# Altium PCB Pic_Board.PCBDOC
Units mm, origin at the board's own origin, x right, y up, seen from the top; angles counter-clockwise.
Board outline 100 x 100 mm, 2 copper layers (TopLayer, BottomLayer); 37 components, 78 nets, 219 pads, 13 vias.
Unrouted connection lines stored in the file: 1.
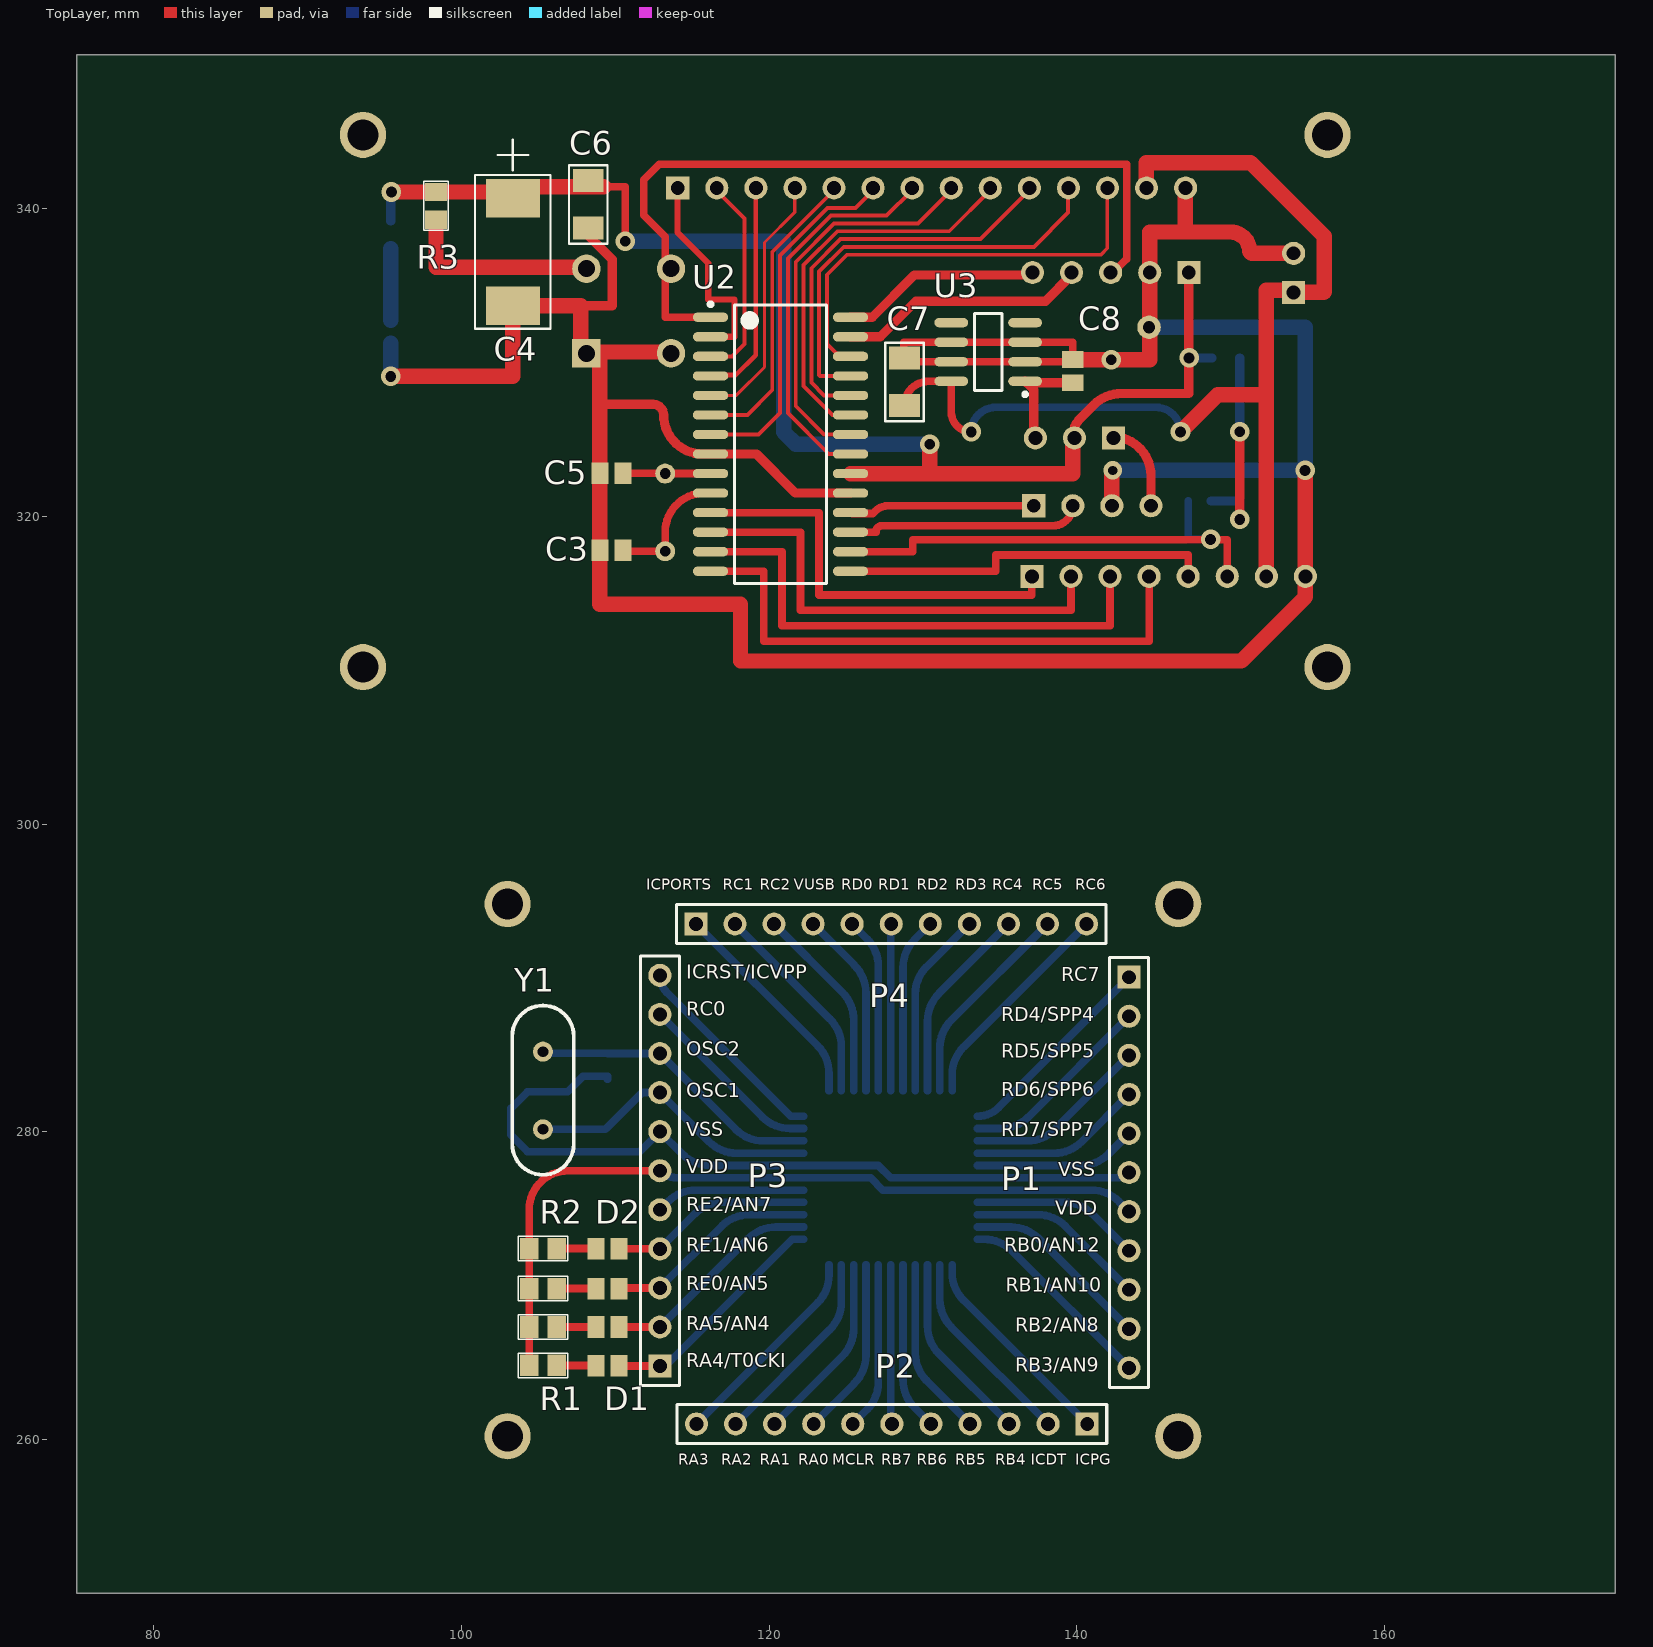
[diagram p0: TopLayer view]
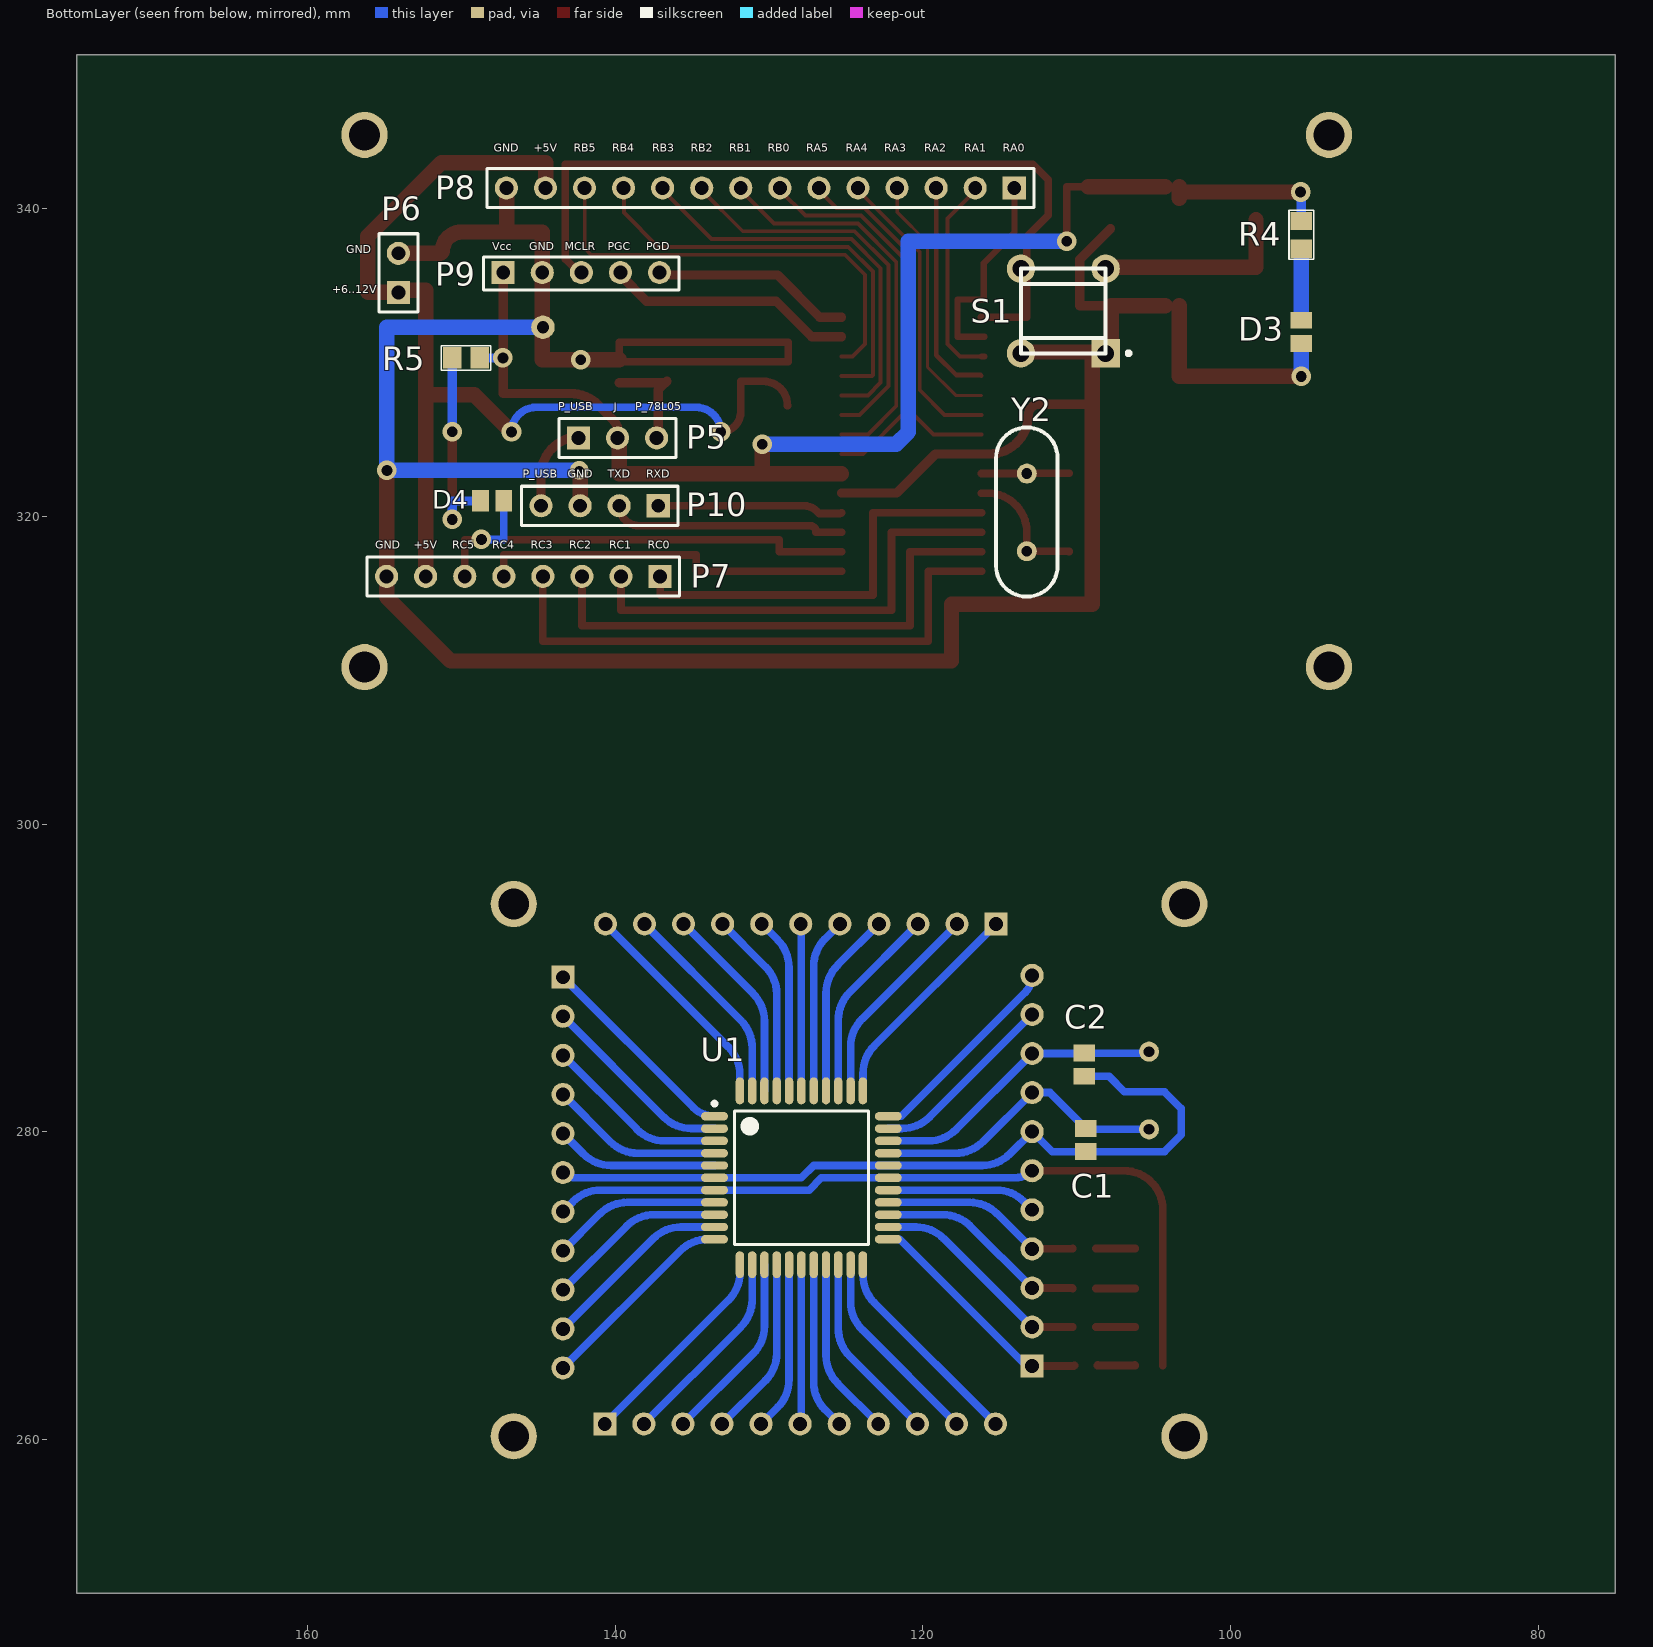
[diagram p1: BottomLayer view, seen from below]

## Layer stack, top to bottom
TopLayer: signal copper 0.0356
Dielectric1: core 0.32, FR-4, Dk 4.8
BottomLayer: signal copper 0.0356

## Board outline
175,350 175,250 75,250 75,350

## Design rules (kind name [scope] priority, off if disabled: settings)
Clearance [All] p1: gap=0.15 ignorepadtopadclearanceinfootprint=FALSE except(0: Arc-Hole Track-Hole SMDPad-Hole THPad-Hole Via-Hole Fill-Hole Poly-Hole Region-Hole Text-Hole)
FabricationTestPointUsage TestPointUsage [All] p1: valid=0 allowmultiple=FALSE
FabricationTestpoint Testpoint [All] p1: side=3 testpointundercomponent=TRUE minsize=1.016 maxsize=2.54 preferedsize=1.524 minholesize=0.508 maxholesize=1.016 preferedholesize=0.813 testpointgrid=0.025 allowsidetop=TRUE allowsidebottom=TRUE usegrid=TRUE gridtolerance=0
PasteMaskExpansion PasteMaskExpansion_1 [InComponent('P1')] p1: expansion=-3.81
PasteMaskExpansion [All] p2: expansion=0
PlaneClearance [All] p1: clearance=0.254
PolygonConnect [All] p1: connectstyle=Relief reliefconductorwidth=0.254 reliefentries=4 polygonreliefangle="90 Angle" airgapwidth=0.254
RoutingVias [All] p1: holewidth=0.711 width=1.27 viastyle="Through Hole" minholewidth=0.711 minwidth=1.27 maxholewidth=0.711 maxwidth=1.27
SilkToSolderMaskClearance SilkscreenOverComponentPads [IsPad] p1: minsilkscreentomaskgap=0.254 clearancetoexposedcopper=TRUE
SolderMaskExpansion [All] p1: expansion=0.051
Width Width_CLK [All] p1: maxlimit=1 minlimit=0.1 preferedwidth=0.15
Width Width_gnd [InNet('GND')] p2: maxlimit=1 minlimit=0.1 preferedwidth=0.254 minimp=50.000000 maximp=50.000000 favimp=50.000000
25 further rules are at their usual default settings.

## Components (designator, comment, footprint, x,y, rotation, side; value= is the part's Value field where it differs from the comment)
1 "Diod" C0805 109.5,267.3 r0 top
2 "Diod" C0805 109.5,269.8 r0 top
3 "0" 6-0805_N 105.3,267.3 r0 top value=510
4 "0" 6-0805_N 105.3,269.8 r0 top value=510
C1 "Cap_20pF" C0805 109.4,279.45 r270 bottom value=20pF
C2 "Cap_20pF" C0805 109.5,284.35 r270 bottom value=20pF
C3 "Cap_20pF" C0805 109.75,317.8 r180 top value=20pF
C4 "Cap_10uF" 2917(TAJ-D) 103.345,340.687 r90 top value=10uF
C5 "Cap_20pF" C0805 109.75,322.8 r180 top value=20pF
C6 "Cap_1uF" 1206 108.245,340.287 r90 top value=1uF
C7 "Cap_0.33uF" 1206 128.8,328.75 r90 top value=0.33uF
C8 "Cap_0.1uF" C0805 139.745,329.437 r90 top value=0.1uF
D1 "Diod" C0805 109.5,264.775 r0 top
D2 "Diod" C0805 109.5,272.4 r0 top
D3 "Diod" C0805 95.4,332 r270 bottom
D4 "Diod" C0805 148,321 r180 bottom
P1 "Header 11" HDR1X11 143.4,290.04 r270 top
P2 "Header 11" HDR1X11 140.68,261 r180 top
P3 "Header 11" HDR1X11 112.9,264.76 r90 top
P4 "Header 11" HDR1X11 115.24,293.5 r0 top
P5 "Питание от USB или от стабилизатора" HDR1X3 142.39,325.1 r180 bottom
P6 "Power" HDR1X2 154.1,334.56 r90 bottom
P7 "Ещё порты" HDR1X8 137.085,316.1 r0 bottom
P8 "Просто порты" HDR1X14 114.06,341.35 r0 bottom
P9 "FIRMWARE" HDR1X5H 147.285,335.85 r180 bottom
P10 "RS232" HDR1X4 137.205,320.687 r0 bottom
R1 "0" 6-0805_N 105.3,264.8 r0 top value=510
R2 "0" 6-0805_N 105.3,272.4 r0 top value=510
R3 "10k" 6-0805_N 98.345,340.187 r270 top
R4 "0" 6-0805_N 95.4,338.3 r270 bottom value=510
R5 "0" 6-0805_N 149.7,330.3 r0 bottom value=510
S1 "SW-DPST" DPST-4 108.124,330.6 r0 bottom
U1 "PIC18F4550-I/PT" TQFP-PT44_N 127.9,277 r180 bottom
U2 "PIC16F876A-I/SO" SOIC-SO28_N 120.745,324.687 r0 top
U3 "L78L05ABD" SO8_N 134.245,330.687 r180 top
Y1 "20MHz" R38 105.3,281.7 r180 top
Y2 "20MHz" R38 113.245,319.282 r0 bottom

## Footprints (in the part's own frame and the unit in brackets; to place one, negate y for a bottom-side part, rotate by r counter-clockwise, add the part's x,y. Pads: shape width x height; smd on the part's side, far side on the other; paste and mask are expansions set on the pad)
6-0805_N [mm] "Chip Resistor, Body 2.0x1.2mm, IPC Medium Density"
  rect 1.2x1.4 smd: 1(-0.9,0) 2(0.9,0)
  silkscreen extent -1.6,-0.8 1.6,0.8, body extent -1.07,-0.7 1.07,0.7, height 0.7
1206 [mm]
  rect 1.5x2 smd: 1(-1.55,0) 2(1.55,0)
  silkscreen extent -2.56,-1.25 2.54,1.25
2917(TAJ-D) [mm]
  rect 2.5x3.5 smd: 1(0,0) 2(-7,0)
  silkscreen extent -8.5,-2.44 3.8,2.46, body extent -7.3,-2.3 0.3,2.3, height 3.1
C0805 [mm] "Chip Capacitor, Body 2.0x1.3mm, IPC High Density"
  rect 1.1x1.4 smd: 1(-0.75,0) 2(0.75,0)
  body extent -1.1,-0.72 1.1,0.72, height 1.4
DPST-4 [mm] "Switch; 4 Leads"
  rect 1.85x1.85 hole 1.1: 1(0,0)
  round 1.85 hole 1.1: 2(5.5,0) 3(0,-5.5) 4(5.5,-5.5)
  silkscreen extent -1.62,-5.5 5.5,0.12
HDR1X2 [mm] "Connector; Header; 2 Position"
  rect 1.5x1.5 hole 0.9: 1(0,0)
  round 1.5 hole 0.9: 2(2.54,0)
  silkscreen extent -1.27,-1.27 3.81,1.27
HDR1X3 [mm] "Connector; Header; 3 Position"
  rect 1.5x1.5 hole 0.9: 1(0,0)
  round 1.5 hole 0.9: 2(2.54,0) 3(5.08,0)
  silkscreen extent -1.27,-1.27 6.35,1.27
HDR1X4 [mm] "Connector; Header; 4 Position"
  rect 1.5x1.5 hole 0.9: 1(0,0)
  round 1.5 hole 0.9: 2(2.54,0) 3(5.08,0) 4(7.62,0)
  silkscreen extent -1.27,-1.27 8.89,1.27
HDR1X5H [mm] "Connector; Header; 5 Position; Right Angle"
  rect 1.5x1.5 hole 0.9: 1(0,0)
  round 1.5 hole 0.9: 2(2.54,0) 3(5.08,0) 4(7.62,0) 5(10.16,0)
  silkscreen extent -1.27,-1.14 11.43,1.02
HDR1X8 [mm] "Connector; Header; 8 Position"
  rect 1.5x1.5 hole 0.9: 1(0,0)
  round 1.5 hole 0.9: 2(2.54,0) 3(5.08,0) 4(7.62,0) 5(10.16,0) 6(12.7,0) 7(15.24,0) 8(17.78,0)
  silkscreen extent -1.27,-1.27 19.05,1.27
HDR1X11 [mm] "Connector; Header; 11 Position"
  rect 1.5x1.5 hole 0.9: 1(0,0)
  round 1.5 hole 0.9: 2(2.54,0) 3(5.08,0) 4(7.62,0) 5(10.16,0) 6(12.7,0) 7(15.24,0) 8(17.78,0) 9(20.32,0) 10(22.86,0) 11(25.4,0)
  silkscreen extent -1.27,-1.27 26.67,1.27
HDR1X14 [mm] "Connector; Header; 14 Position"
  rect 1.5x1.5 hole 0.9: 1(0,0)
  round 1.5 hole 0.9: 2(2.54,0) 3(5.08,0) 4(7.62,0) 5(10.16,0) 6(12.7,0) 7(15.24,0) 8(17.78,0) 9(20.32,0) 10(22.86,0) 11(25.4,0) 12(27.94,0) 13(30.48,0) 14(33.02,0)
  silkscreen extent -1.27,-1.27 34.29,1.27
R38 [mm] "Crystal, Thru-Hole; 2 Leads; Body 3.1 x 8.2 mm (Dia.xH)"
  round 1.3 hole 0.7: 1(0,1.55) 2(0,-3.5)
  silkscreen extent -2,-6.5 2,4.5
SO8_N [mm] "SOIC, 8-Leads, Body 4.9x3.9mm, Pitch 1.27mm, IPC Medium Density"
  oval 2.2x0.6 smd: 1(-2.4,1.905) 2(-2.4,0.635) 3(-2.4,-0.635) 4(-2.4,-1.905) 5(2.4,-1.905) 6(2.4,-0.635) 7(2.4,0.635) 8(2.4,1.905)
  silkscreen extent -2.53,-2.5 0.9,2.88, body extent -1.95,-2.45 1.95,2.45, height 1.75
SOIC-SO28_N [mm] "SOIC, 28-Leads, Body 17.9x7.5mm, Pitch 1.27mm, IPC Medium Density"
  oval 2.3x0.6 smd: 1(-4.55,8.255) 2(-4.55,6.985) 3(-4.55,5.715) 4(-4.55,4.445) 5(-4.55,3.175) 6(-4.55,1.905) 7(-4.55,0.635) 8(-4.55,-0.635) 9(-4.55,-1.905) 10(-4.55,-3.175) 11(-4.55,-4.445) 12(-4.55,-5.715) 13(-4.55,-6.985) 14(-4.55,-8.255) 15(4.55,-8.255) 16(4.55,-6.985) 17(4.55,-5.715) 18(4.55,-4.445) 19(4.55,-3.175) 20(4.55,-1.905) 21(4.55,-0.635) 22(4.55,0.635) 23(4.55,1.905) 24(4.55,3.175) 25(4.55,4.445) 26(4.55,5.715) 27(4.55,6.985) 28(4.55,8.255)
  silkscreen extent -4.67,-9.05 3,9.23, body extent -3.8,-9.06 3.8,9.06, height 2.65
TQFP-PT44_N [mm] "Thin QFP, 44-Leads, Body 10x10mm, Pitch 0.8mm, IPC Medium Density"
  oval 1.75x0.55 smd: 1(-5.65,4) 2(-5.65,3.2) 3(-5.65,2.4) 4(-5.65,1.6) 5(-5.65,0.8) 6(-5.65,0) 7(-5.65,-0.8) 8(-5.65,-1.6) 9(-5.65,-2.4) 10(-5.65,-3.2) 11(-5.65,-4) 23(5.65,-4) 24(5.65,-3.2) 25(5.65,-2.4) 26(5.65,-1.6) 27(5.65,-0.8) 28(5.65,0) 29(5.65,0.8) 30(5.65,1.6) 31(5.65,2.4) 32(5.65,3.2) 33(5.65,4)
  oval 0.55x1.75 smd: 12(-4,-5.65) 13(-3.2,-5.65) 14(-2.4,-5.65) 15(-1.6,-5.65) 16(-0.8,-5.65) 17(0,-5.65) 18(0.8,-5.65) 19(1.6,-5.65) 20(2.4,-5.65) 21(3.2,-5.65) 22(4,-5.65) 34(4,5.65) 35(3.2,5.65) 36(2.4,5.65) 37(1.6,5.65) 38(0.8,5.65) 39(0,5.65) 40(-0.8,5.65) 41(-1.6,5.65) 42(-2.4,5.65) 43(-3.2,5.65) 44(-4,5.65)
  silkscreen extent -5.77,-4.35 4.35,4.95, body extent -5,-5 5,5, height 1.2

## Part data
3 4 R1 R2 R4 R5: library part Res_2, "Res_2", Code_IPC=RESC2012, LatestRevisionDate=29-May-2009, LatestRevisionNote="IPC-7351 Footprint Added.", PackageDescription="Chip Resistor 0805 Case Size", PackageReference=6-0805, PackageVersion=Mar-2003, Published=24-Mar-1999, Publisher="Altium Limited"
P1 P2 P3 P4: "Header, 11-Pin", LatestRevisionDate=17-Jul-2002, LatestRevisionNote="Re-released for DXP Platform.", Publisher="Altium Limited"
P5: library part "Header 3", "Header, 3-Pin", LatestRevisionDate=17-Jul-2002, LatestRevisionNote="Re-released for DXP Platform.", Publisher="Altium Limited"
P6: library part "Header 2", "Header, 2-Pin", LatestRevisionDate=17-Jul-2002, LatestRevisionNote="Re-released for DXP Platform.", Publisher="Altium Limited"
P7: library part "Header 8", "Header, 8-Pin", LatestRevisionDate=17-Jul-2002, LatestRevisionNote="Re-released for DXP Platform.", Publisher="Altium Limited"
P8: library part "Header 14", "Header, 14-Pin", LatestRevisionDate=17-Jul-2002, LatestRevisionNote="Re-released for DXP Platform.", Publisher="Altium Limited"
P9: library part "Header 5H", "Header, 5-Pin, Right Angle", LatestRevisionDate=17-Jul-2002, LatestRevisionNote="Re-released for DXP Platform.", Publisher="Altium Limited"
P10: library part "Header 4", "Header, 4-Pin", LatestRevisionDate=17-Jul-2002, LatestRevisionNote="Re-released for DXP Platform.", Publisher="Altium Limited"
R3: library part "Res Thermal", "Thermistor", Code_IPC=RESC2012, LatestRevisionDate=29-May-2009, LatestRevisionNote="IPC-7351 Footprint Added.", PackageDescription="Chip Resistor 0805 Case Size", PackageReference=6-0805, PackageVersion=Mar-2003, Published=24-Mar-1999, Publisher="Altium Limited"
S1: "Double-Pole, Single-Throw Switch", LatestRevisionDate=17-Jul-2002, LatestRevisionNote="Re-released for DXP Platform.", PackageDescription="Switch; 4 Leads", PackageReference=DPST-4, Published=24-Mar-1999, Publisher="Altium Limited"
U1: "High Performance, Enhanced Flash, USB Microcontroller with nanoWatt Technology, 32K Flash, 44-Pin TQFP, Industrial Temperature Range", Supplier Part Number 1=PIC18F4550-I/PT-ND, Code_JEDEC=MS-026, ComponentLink1Description=Datasheet, ComponentLink1URL=http://ww1.microchip.com/downloads/en/DeviceDoc/39632e.pdf, ComponentLink2Description="Packaging Specification", ComponentLink2URL=http://www.microchip.com/stellent/groups/techpub_sg/documents/packagingspec/en012702.pdf, ComponentLink3Description="Microchip.com Home", ComponentLink3URL=http://www.microchip.com/, DatasheetVersion="revE, Aug-2008", LatestRevisionDate=02-Dec-2009, LatestRevisionNote="Updated to datasheet revision E, Aug-2008", PackageDescription="44-Lead Plastic Thin Quad Flatpack (PT) - 10x10x1mm Body, 2.00mm [TQFP]", PackageReference=TQFP-PT44, PackageVersion="revBB, Aug-2009", Published=29-Jan-2009, Publisher="Altium Limited", Supplier 1=Digi-Key, Supplier 2=Farnell, Supplier 3=Farnell, Supplier Part Number 2=9321365, Supplier Part Number 3=1528447
U2: "Enhanced FLASH Microcontroller, 8K (x14-Bit words) FLASH, 368 Bytes RAM, 28-Pin SOIC, Standard VDD Range, Industrial Temperature", Supplier Part Number 1=PIC16F876A-I/SO-ND, Code_JEDEC=MS-013, ComponentAvailability="Unknown. Contact manufacturer to determine status.", ComponentLink1Description=Datasheet, ComponentLink1URL=http://ww1.microchip.com/downloads/en/DeviceDoc/39582b.pdf, ComponentLink2Description="Packaging Specification", ComponentLink2URL=http://www.microchip.com/stellent/groups/techpub_sg/documents/packagingspec/en012702.pdf, ComponentLink3Description="Microchip.com Home", ComponentLink3URL=http://www.microchip.com/, DatasheetVersion="revB, Oct-2003", LatestRevisionDate=29-Jan-2009, LatestRevisionNote="Sch. layout revised. 3D Model Removed.", PackageDescription="28-Lead Plastic Small Outline (SO) - Wide 7.50mm Body [SOIC]", PackageReference=SOIC-SO28, PackageVersion="revBB, Aug-2009", Published=11-Oct-2004, Publisher="Altium Limited", Supplier 1=Digi-Key, Supplier 2=Farnell, Supplier 3=Farnell, Supplier Part Number 2=9761306, Supplier Part Number 3=1660040
U3: "Positive Voltage Regulator", Code_IPC=SOIC127P600-8, Code_JEDEC=MS-012-AA, ComponentLink1Description="Manufacturer Link", ComponentLink1URL=http://www.st.com/, DatasheetVersion=Feb-1999, LatestRevisionDate=13-Apr-2006, LatestRevisionNote="IPC-7351 Footprint Added.", PackageDescription="8-Pin Small Outline Integrated Circuit 1.27 mm Pitch", PackageReference=SO8, PackageVersion=Dec-2002, Published=24-Aug-2001, Publisher="Altium Limited"
Y1 Y2: library part XTAL, "Crystal Oscillator", LatestRevisionDate=17-Jul-2002, LatestRevisionNote="Re-released for DXP Platform.", PackageDescription="Crystal, Thru-Hole; 2 Leads; Body 3.1 x 8.2 mm (Dia.xH)", PackageReference=R38, Published=8-Jun-2000, Publisher="Altium Limited"
C1 C2 C3 C4 C5 C6 C7 C8: LatestRevisionDate=29-May-2009, LatestRevisionNote="IPC-7351 Footprint Added.", PackageDescription="Chip Capacitor", PackageReference=C0805, Published=8-Jun-2000, Publisher="Altium Limited"

## Free pads (board coordinates)
  round 1.524 hole 0.8: 2(144.7,332.3)
  round 3 hole 2: 3(93.6,310.2) 3(93.6,344.8) 3(103,260.2) 3(103,294.8) 3(146.6,260.2) 3(146.6,294.8) 3(156.3,310.2) 3(156.3,344.8)

## Via types
v1: diameter 1.27, hole 0.7, TopLayer to BottomLayer, 12 vias
v2: diameter 1.2, hole 0.6, TopLayer to BottomLayer, 1 vias

## Nets (pads, with @x,y where several pads share a name; then routed paths per layer and width w, separated by ;. In a path a pad name is that pad's centre, name@x,y a point inside that pad or via, vN(x,y) a via of type N, cw(c..) or ccw(c..) an arc to the next point about the centre after c; other vN are vias at no path point)
1: P1.1 U1.1 | length 13.5
  BottomLayer w0.5: U1.1 ccw(c133.55,282.956) 134.933,281.573 P1.1
2: P1.2 U1.2 | length 12.8
  BottomLayer w0.5: U1.2 135.048,280.2 ccw(c135.048,282.74) 136.844,280.944 P1.2
3: P1.3 U1.3 | length 12
  BottomLayer w0.5: U1.3 136.788,279.4 ccw(c136.788,281.94) 138.584,280.144 P1.3
4: P1.4 U1.4 | length 11.3
  BottomLayer w0.5: U1.4 138.528,278.6 ccw(c138.528,281.14) 140.324,279.344 P1.4
5: P1.5 U1.5 | length 10.6
  BottomLayer w0.5: U1.5 140.268,277.8 ccw(c140.268,280.34) 142.064,278.544 P1.5
12: P2.1 U1.12 | length 13.9
  BottomLayer w0.5: U1.12 131.9,270.832 ccw(c134.44,270.832) 132.644,269.036 P2.1
13: P2.2 U1.13 | length 13.2
  BottomLayer w0.5: U1.13 131.1,269.092 ccw(c133.64,269.092) 131.844,267.296 P2.2
14: P2.3 U1.14 | length 12.4
  BottomLayer w0.5: U1.14 130.3,267.352 ccw(c132.84,267.352) 131.044,265.556 P2.3
15: P2.4 U1.15 | length 11.7
  BottomLayer w0.5: U1.15 129.5,265.612 ccw(c132.04,265.612) 130.244,263.816 P2.4
16: P2.5 U1.16 | length 11
  BottomLayer w0.5: U1.16 128.7,263.872 ccw(c131.24,263.872) 129.444,262.076 P2.5
17: P2.6 U1.17 | length 10.4
  BottomLayer w0.5: U1.17 127.9,261.193 ccw(c128.173,261.193) P2.6
18: P2.7 U1.18 | length 10.9
  BottomLayer w0.5: P2.7 126.356,261.916 ccw(c124.56,263.712) 127.1,263.712 U1.18
19: P2.8 U1.19 | length 11.6
  BottomLayer w0.5: P2.8 125.556,263.656 ccw(c123.76,265.452) 126.3,265.452 U1.19
20: P2.9 U1.20 | length 12.4
  BottomLayer w0.5: P2.9 124.756,265.396 ccw(c122.96,267.192) 125.5,267.192 U1.20
21: P2.10 U1.21 | length 13.1
  BottomLayer w0.5: P2.10 123.956,267.136 ccw(c122.16,268.932) 124.7,268.932 U1.21
22: P2.11 U1.22 | length 13.8
  BottomLayer w0.5: P2.11 123.156,268.876 ccw(c121.36,270.672) 123.9,270.672 U1.22
27: P3.5 U1.27 | length 9.8
  BottomLayer w0.5: P3.5 113.436,275.456 cw(c115.232,273.66) 115.232,276.2 U1.27
30: C1.1 P3.8 U1.30 Y1.1 | length 19.8
  TopLayer w0.5: P3.8@112.542,282.54 P3.8
  BottomLayer w0.5: Y1.1 109.35,280.15 C1.1 111.74,282.54 P3.8 116.096,279.344 ccw(c117.892,281.14) 117.892,278.6 U1.30
31: C2.1 P3.9 U1.31 Y1.2 | length 19.3
  TopLayer w0.5: P3.9@112.852,285.1 cw(c112.852,285.032) P3.9
  BottomLayer w0.5: Y1.2 105.4,285.1 C2.1 109.52,285.08 P3.9 117.836,280.144 ccw(c119.632,281.94) 119.632,279.4 U1.31
32: P3.10 U1.32 | length 12.3
  BottomLayer w0.5: P3.10 119.576,280.944 ccw(c121.372,282.74) 121.372,280.2 U1.32
33: P3.11 U1.33 | length 13.8
  BottomLayer w0.5: P3.11@113.224,290.026 ccw(c112.9,289.701) P3.11 ccw(c114.493,290.16) 113.367,289.033 121.4,281 U1.33
34: P4.1 U1.34 | length 14.3
  BottomLayer w0.5: P4.1 123.156,285.584 cw(c121.36,283.788) 123.9,283.788 U1.34
35: P4.2 U1.35 | length 13.6
  BottomLayer w0.5: P4.2 123.956,287.324 cw(c122.16,285.528) 124.7,285.528 U1.35
36: P4.3 U1.36 | length 12.9
  BottomLayer w0.5: P4.3 124.756,289.064 cw(c122.96,287.268) 125.5,287.268 U1.36
37: P4.4 U1.37 | length 12.2
  BottomLayer w0.5: P4.4 125.556,290.804 cw(c123.76,289.008) 126.3,289.008 U1.37
38: P4.5 U1.38 | length 11.4
  BottomLayer w0.5: P4.5 126.356,292.544 cw(c124.56,290.748) 127.1,290.748 U1.38
39: P4.6 U1.39 | length 10.9
  BottomLayer w0.5: U1.39 127.9,293.403 cw(c128.037,293.403) P4.6
40: P4.7 U1.40 | length 11.5
  BottomLayer w0.5: U1.40 128.7,290.668 cw(c131.24,290.668) 129.444,292.464 P4.7
41: P4.8 U1.41 | length 12.2
  BottomLayer w0.5: U1.41 129.5,288.928 cw(c132.04,288.928) 130.244,290.724 P4.8
42: P4.9 U1.42 | length 12.9
  BottomLayer w0.5: U1.42 130.3,287.188 cw(c132.84,287.188) 131.044,288.984 P4.9
43: P4.10 U1.43 | length 13.6
  BottomLayer w0.5: U1.43 131.1,285.448 cw(c133.64,285.448) 131.844,287.244 P4.10
44: P4.11 U1.44 | length 14.4
  BottomLayer w0.5: U1.44 131.9,283.708 cw(c134.44,283.708) 132.644,285.504 P4.11
+5V: C7.1 P6.1 P7.7 P8.13 U3.8 | length 70.8
  TopLayer w0.5: C7.1 cw(c130.382,327.2) 130.382,328.782 U3.8 131.845,326.787 ccw(c133.145,326.787) v1(133.145,325.487) ; v1(146.745,325.487) v1@146.745,325.587
  TopLayer w1: P8.13@144.525,341.187 144.525,343 151.3,343 156.1,338.2 156.1,334.6 156.06,334.56 P6.1 ; v1(146.745,325.487) 149.158,327.9 152.325,327.9 ; P7.7@152.325,316.187 152.325,327.9 ; P6.1@153.516,334.687 152.325,334.687 152.325,327.9
  BottomLayer w0.5: v1(133.145,325.487) cw(c134.745,325.487) 134.745,327.087 145.145,327.087 cw(c145.145,325.487) v1(146.745,325.487)
GND: C3.2 C4.2 C5.2 C6.1 C7.2 C8.2 D3.2 P6.2 P7.8 P8.14 P9.2 P10.3 pad.2 S1.1 S1.2 U2.8 U2.19 U3.2 U3.3 U3.6 U3.7 | length 214.7
  TopLayer w0.5: C7.2@128.745,330.052 U3.7 U3.2 139.745,330.052 C8.2 139.745,331.322 U3.3 U3.6 128.745,331.322 C7.2@128.745,330.052
  TopLayer w0.6: 107.745,333.687 109.8,333.687 109.8,336.7 C6.1@107.8,338.7 ; 108.995,327.287 112.45,327.287 cw(c112.45,326.592) 113.145,326.592 ccw(c115.685,326.592) 115.685,324.052 U2.8 119.18,324.052 121.72,321.512 U2.19
  TopLayer w1: v1(95.4,329.1) 103.345,329.1 C4.2 ; C4.2@104.245,333.687 107.745,333.687 107.745,330.687 S1.1@108.995,330.687 ; S1.2@113.245,330.687 S1.1@108.995,330.687 ; C8.2 v1(142.245,330.187) 144.745,330.187 P9.2 144.745,338.487 147.065,338.487 ; P10.3 142.285,322.987 v2(142.345,322.987) ; P8.14@147.065,341.187 147.065,338.487 ; P6.2 151.372,337.1 151.245,337.227 ccw(c149.985,337.227) 149.985,338.487 147.065,338.487 ; v1(154.845,322.987) 154.845,316.207 ccw(c154.865,316.207) 154.865,316.187 P7.8 154.865,314.765 150.7,310.6 118.145,310.6 118.145,314.287 108.995,314.287 108.995,324.687 108.995,327.287 S1.1@108.995,330.687
  BottomLayer w1: v1(95.4,329.1) D3.2 ; v2(142.345,322.987) v1(154.845,322.987) 154.845,332.3 pad.2
Jumper: C4.1 C6.2 P5.2 P9.1 R3.1 R4.1 R5.1 U2.20 | length 90.5
  TopLayer w0.2: v1(110.645,337.887) v1@110.895,338.137
  TopLayer w0.5: C6.2@109.245,341.437 110.645,341.437 v1(110.645,337.887)
  TopLayer w0.6: P5.2@139.745,325.187 cw(c141.435,325.187) 140.24,326.382 141.101,327.243 cw(c142.897,325.447) 142.897,327.987 147.285,327.987 P9.1@147.285,335.687
  TopLayer w1: v1@95.345,341.087 C4.1@103.345,341.087 ; C4.1 C4.1@103.345,341.087 ; C4.1@103.345,341.437 C4.1@103.345,341.087 ; C4.1@104.245,341.437 C6.2@109.245,341.437 ; U2.20 130.445,322.782 ; v1(130.445,324.687) 130.445,322.782 ; P5.2@139.745,325.187 139.745,322.782 130.445,322.782
  BottomLayer w0.6: v1@95.345,341.087 95.4,341.087 R4.1 ; v1@147.3,330.4 v1(147.3,330.3) R5.1
  BottomLayer w1: v1(110.645,337.887) 120.945,337.887 120.945,325.487 121.745,324.687 v1(130.445,324.687)
  other v1: 95.445,341.087
MCLR: P9.3 R3.2 S1.3 S1.4 U2.1 | length 64.4
  TopLayer w0.5: U2.1 113.245,332.942 113.245,338.187 111.845,339.587 111.845,341.882 112.85,342.887 143.245,342.887 143.245,341.878 143.254,341.869 143.254,336.736 P9.3@142.205,335.687
  TopLayer w1: R3.2 98.345,336.187 S1.3@107.745,336.187
Net1_1: 1.1 3.2 | length 2.6
  TopLayer w0.5: 3.2 1.1
Net2_1: 2.1 4.2 | length 2.5
  TopLayer w0.5: 4.2 2.1
NetC3_1: C3.1 U2.10 Y2.1 | length 8.4
  TopLayer w0.5: C3.1@110.5,317.7 110.5,317.732 Y2.1 113.245,318.972 cw(c115.785,318.972) 115.785,321.512 U2.10
NetC5_1: C5.1 U2.9 Y2.2 | length 5.7
  TopLayer w0.5: C5.1 113.245,322.8 Y2.2 U2.9
NetD1_1: D1.1 R1.2 | length 2.5
  TopLayer w0.5: R1.2@106.225,264.825 R1.2 108.6,264.8 108.625,264.825 D1.1@108.65,264.8
NetD2_1: D2.1 R2.2 | length 2.6
  TopLayer w0.5: R2.2 D2.1
NetD3_1: D3.1 R4.2 | length 4.7
  BottomLayer w1: D3.1 R4.2
NetD4_1: D4.1 R5.2 | length 13.6
  TopLayer w0.6: v1(150.6,319.8) v1(150.6,325.5)
  BottomLayer w0.6: D4.1 150.6,321 v1(150.6,319.8) ; v1(150.6,325.5) R5.2
PGC: P9.4 U2.27 | length 16
  TopLayer w0.6: U2.27 127.23,331.672 129.545,333.987 137.965,333.987 P9.4@139.665,335.687
PGD: P9.5 U2.28 | length 13
  TopLayer w0.6: U2.28 126.7,332.942 129.445,335.687 P9.5@137.125,335.687
Power_78L05: C8.1 P5.3 U3.1 | length 6.8
  TopLayer w0.6: U3.1 U3.1@136.74,328.687 ; P5.3@137.205,325.187 137.205,328.222 U3.1@136.74,328.687 ; C8.1 U3.1@136.74,328.687
Power_USB: P5.1 P10.4 | length 5.9
  TopLayer w0.6: P5.1@142.285,325.187 cw(c142.285,322.647) 144.825,322.647 P10.4
RA0: P8.1 U2.2 | length 13.8
  TopLayer w0.4: P8.1@114.045,341.187 114.045,338.455 116.045,336.455 116.045,334.087 117.745,334.087 117.745,331.672 U2.2 U2.2@115.995,331.672
RA1: P8.2 U2.3 | length 13.5
  TopLayer w0.254: U2.3 117.602,330.402 118.4,331.2 118.4,339.372 P8.2@116.585,341.187
  TopLayer w0.4: U2.3@115.995,330.402 U2.3
RA2: P8.3 U2.4 | length 14.2
  TopLayer w0.3: U2.4 116.25,329.187 117.845,329.187 119.125,330.467 P8.3@119.125,341.187
RA3: P8.4 U2.5 | length 16.6
  TopLayer w0.203: U2.5 117.862,327.862 119.7,329.7 119.7,337.8 121.665,339.765 P8.4@121.665,341.187
RA4: P8.5 U2.6 | length 19.3
  TopLayer w0.254: U2.6 118.592,326.592 120.208,328.208 120.208,337.179 120.761,337.732 120.761,337.743 P8.5@124.205,341.187
RA4#: D1.2 P3.1 U1.23 | length 15.5
  TopLayer w0.5: D1.2@110.15,264.8 110.19,264.76 P3.1
  BottomLayer w0.5: P3.1 113.26,264.76 121.5,273 U1.23
RA5: P8.6 U2.7 | length 23.1
  TopLayer w0.254: U2.7 119.322,325.322 120.716,326.716 120.716,336.969 123.803,340.056 125.614,340.056 P8.6@126.745,341.187
RA5#: 1.2 P3.2 U1.24 | length 14.6
  TopLayer w0.5: 1.2 P3.2
  BottomLayer w0.5: P3.2 118.656,273.056 cw(c120.452,271.26) 120.452,273.8 U1.24
RB0: P8.7 U2.21 | length 25.1
  TopLayer w0.254: U2.21 123.88,324.052 121.224,326.708 121.224,336.758 124.014,339.548 127.646,339.548 P8.7@129.285,341.187
RB0#: P1.8 U1.8 | length 11
  BottomLayer w0.5: U1.8 139.208,275.4 cw(c139.208,272.86) 141.004,274.656 P1.8
RB1: P8.8 U2.22 | length 25.7
  TopLayer w0.254: U2.22 123.578,325.322 121.732,327.168 121.732,336.548 124.224,339.04 129.678,339.04 P8.8@131.825,341.187
RB1#: P1.9 U1.9 | length 11.8
  BottomLayer w0.5: U1.9 137.468,274.6 cw(c137.468,272.06) 139.264,273.856 P1.9
RB2: P8.9 U2.23 | length 25.8
  TopLayer w0.254: U2.23 124.128,326.592 122.24,328.48 122.24,336.337 124.435,338.532 131.71,338.532 P8.9@134.365,341.187
RB2#: P1.10 U1.10 | length 12.5
  BottomLayer w0.5: U1.10 135.728,273.8 cw(c135.728,271.26) 137.524,273.056 P1.10
RB3: P8.10 U2.24 | length 26.6
  TopLayer w0.254: U2.24 123.576,327.862 122.748,328.69 122.748,336.127 124.645,338.024 133.742,338.024 P8.10@136.905,341.187
RB3#: P1.11 U1.11 | length 13.2
  BottomLayer w0.5: U1.11 133.988,273 cw(c133.988,270.46) 135.784,272.256 P1.11
RB4: P8.11 U2.25 | length 28
  TopLayer w0.254: U2.25 123.322,329.132 123.256,329.198 123.256,335.916 124.856,337.516 137.216,337.516 139.445,339.745 P8.11@139.445,341.187
RB5: P8.12 U2.26 | length 29.1
  TopLayer w0.254: U2.26 124.568,330.402 123.764,331.206 123.764,335.706 125.066,337.008 141.566,337.008 141.985,337.427 P8.12@141.985,341.187
RC0: P7.1 U2.11 | length 27.5
  TopLayer w0.5: U2.11 123.245,320.242 123.245,314.887 137.085,314.887 P7.1 P7.1@137.085,316.187
RC1: P7.2 U2.12 | length 30.8
  TopLayer w0.5: U2.12 122.045,318.972 122.045,313.887 139.625,313.887 P7.2 P7.2@139.625,316.187
RC2: P7.3 U2.13 | length 34.1
  TopLayer w0.5: U2.13 120.845,317.702 120.845,312.887 142.165,312.887 P7.3 P7.3@142.165,316.187
RC3: P7.4 U2.14 | length 37.4
  TopLayer w0.5: U2.14 119.645,316.432 119.645,311.887 144.705,311.887 P7.4 P7.4@144.705,316.187
RC4: P7.5 U2.15 | length 24.3
  TopLayer w0.5: U2.15 134.745,316.432 134.745,317.487 147.245,317.487 P7.5@147.245,316.187
RC5: D4.2 P7.6 U2.16 | length 31.7
  TopLayer w0.254: U2.16 U2.16@125.419,317.826
  TopLayer w0.5: U2.16 129.345,317.702 129.345,318.487 149.785,318.487 P7.6@149.785,316.187
  BottomLayer w0.5: D4.2 147.25,318.5 v1(148.7,318.5)
RE0#: 2.2 P3.3 U1.25 | length 13.9
  TopLayer w0.5: 2.2 110.29,269.84 P3.3
  BottomLayer w0.5: P3.3 116.916,273.856 cw(c118.712,272.06) 118.712,274.6 U1.25
RE1#: D2.2 P3.4 U1.26 | length 13.1
  TopLayer w0.5: D2.2 110.27,272.38 P3.4
  BottomLayer w0.5: P3.4 115.176,274.656 cw(c116.972,272.86) 116.972,275.4 U1.26
RXD: P10.1 U2.18 | length 12.1
  TopLayer w0.5: U2.18 ccw(c125.428,320.375) 125.428,320.187 126.745,320.187 126.895,320.337 cw(c127.74,319.492) 127.74,320.687 P10.1
TXD: P10.2 U2.17 | length 15.4
  TopLayer w0.5: U2.17 126.945,318.972 126.945,318.987 cw(c127.345,318.987) 127.345,319.387 138.445,319.387 ccw(c138.445,320.687) P10.2
VDD#: 3.1 4.1 P1.7 P3.6 R1.1 R2.1 U1.7 U1.28 | length 51.5
  TopLayer w0.5: R1.1 3.1 4.1 R2.1 104.4,274.92 cw(c106.94,274.92) 106.94,277.46 P3.6
  BottomLayer w0.5: P3.6 ccw(c114.011,278.571) 114.011,277 U1.28 126.6,277 127.4,276.2 U1.7 140.948,276.2 cw(c140.948,273.66) 142.744,275.456 P1.7
VSS: C1.2 C2.2 P1.6 P3.7 U1.6 U1.29 | length 51.5
  BottomLayer w0.5: C2.2@109.5,283.4 C2.2 107.9,283.6 106.9,282.6 104.3,282.6 103.2,281.5 103.2,279.8 104.3,278.7 C1.2 111.6,278.7 P3.7 114.356,278.544 ccw(c116.152,280.34) 116.152,277.8 U1.29 127.1,277.8 127.9,277 U1.6 142.579,277 ccw(c142.579,278.161) P1.6
pads on no net: U3.4 U3.5

## Silkscreen, mask and mechanical layers (free items; w line width, h text height)
TopOverlay:
  text "ICPORTS" at 112,295.475 h1.2
  text "RC1" at 117,295.475 h1.2
  text "RC2" at 119.4,295.475 h1.2
  text "VUSB" at 121.6,295.475 h1.2
  text "RD0" at 124.7,295.475 h1.2
  text "RD1" at 127.1,295.475 h1.2
  text "RD2" at 129.6,295.475 h1.2
  text "RD3" at 132.1,295.475 h1.2
  text "RC4" at 134.5,295.475 h1.2
  text "RC5" at 137.1,295.475 h1.2
  text "RC6" at 139.9,295.475 h1.2
  text "ICRST/ICVPP" at 114.6,289.6 h1.6
  text "RC7" at 139,289.5 h1.52
  text "RC0" at 114.6,287.2 h1.6
  text "RD4/SPP4" at 135.1,286.9 h1.52
  text "OSC2" at 114.6,284.6 h1.6
  text "RD5/SPP5" at 135.1,284.5 h1.52
  text "RD6/SPP6" at 135.1,282 h1.52
  text "OSC1" at 114.6,281.9 h1.6
  text "VSS" at 114.6,279.4 h1.52
  text "RD7/SPP7" at 135.1,279.4 h1.52
  text "VDD" at 114.6,277 h1.52
  text "VSS" at 138.8,276.8 h1.52
  text "RE2/AN7" at 114.6,274.5 h1.6
  text "VDD" at 138.6,274.3 h1.52
  text "RE1/AN6" at 114.6,271.9 h1.52
  text "RB0/AN12" at 135.3,271.9 h1.52
  text "RE0/AN5" at 114.6,269.4 h1.52
  text "RB1/AN10" at 135.4,269.3 h1.52
  text "RA5/AN4" at 114.6,266.8 h1.52
  text "RB2/AN8" at 136,266.7 h1.52
  text "RA4/T0CKI" at 114.6,264.4 h1.52
  text "RB3/AN9" at 136,264.1 h1.52
  text "RA3" at 114.1,258.1 h1.2
  text "RA2" at 116.9,258.1 h1.2
  text "RA1" at 119.4,258.1 h1.2
  text "RA0" at 121.9,258.1 h1.2
  text "MCLR" at 124.1,258.1 h1.2
  text "RB7" at 127.3,258.1 h1.2
  text "RB6" at 129.6,258.1 h1.2
  text "RB5" at 132.1,258.1 h1.2
  text "RB4" at 134.7,258.1 h1.2
  text "ICDT" at 137,258.1 h1.2
  text "ICPG" at 139.9,258.1 h1.2
BottomOverlay:
  text "RA0" at 114.8,343.5 h0.9
  text "RA1" at 117.3,343.5 h0.9
  text "RA2" at 119.9,343.5 h0.9
  text "RA3" at 122.5,343.5 h0.9
  text "RA4" at 125,343.5 h0.9
  text "RA5" at 127.6,343.5 h0.9
  text "RB0" at 130.1,343.5 h0.9
  text "RB1" at 132.6,343.5 h0.9
  text "RB2" at 135.1,343.5 h0.9
  text "RB3" at 137.6,343.5 h0.9
  text "RB4" at 140.2,343.5 h0.9
  text "RB5" at 142.7,343.5 h0.9
  text "+5V" at 145.3,343.5 h0.9
  text "GND" at 147.9,343.5 h0.9
  text "PGD" at 138,337.1 h0.9
  text "PGC" at 140.5,337.1 h0.9
  text "MCLR" at 143.3,337.1 h0.9
  text "GND" at 145.6,337.1 h0.9
  text "Vcc" at 148,337.1 h0.9
  text "GND" at 157.5,336.9 h0.9
  text "+6..12V" at 158.4,334.3 h0.9
  text "P_78L05" at 138.7,326.7 h0.9
  text "J" at 140.1,326.7 h0.9
  text "P_USB" at 143.7,326.7 h0.9
  text "RXD" at 138,322.3 h0.9
  text "TXD" at 140.5,322.3 h0.9
  text "GND" at 143.1,322.3 h0.9
  text "P_USB" at 146,322.3 h0.9
  text "RC0" at 137.9,317.7 h0.9
  text "RC1" at 140.4,317.7 h0.9
  text "RC2" at 143,317.7 h0.9
  text "RC3" at 145.5,317.7 h0.9
  text "RC4" at 148,317.7 h0.9
  text "RC5" at 150.6,317.7 h0.9
  text "+5V" at 153.1,317.7 h0.9
  text "GND" at 155.6,317.7 h0.9
Mechanical1:
  the board outline again, w1